# Altium PCB Temperature_Sensor_0_new.PcbDoc
Units mil, origin at the board's own origin, x right, y up, seen from the top; angles counter-clockwise.
Board outline 6000 x 4000 mil, 2 copper layers (Top Layer, Bottom Layer); 8 components, 5 nets, 25 pads, 3 vias.
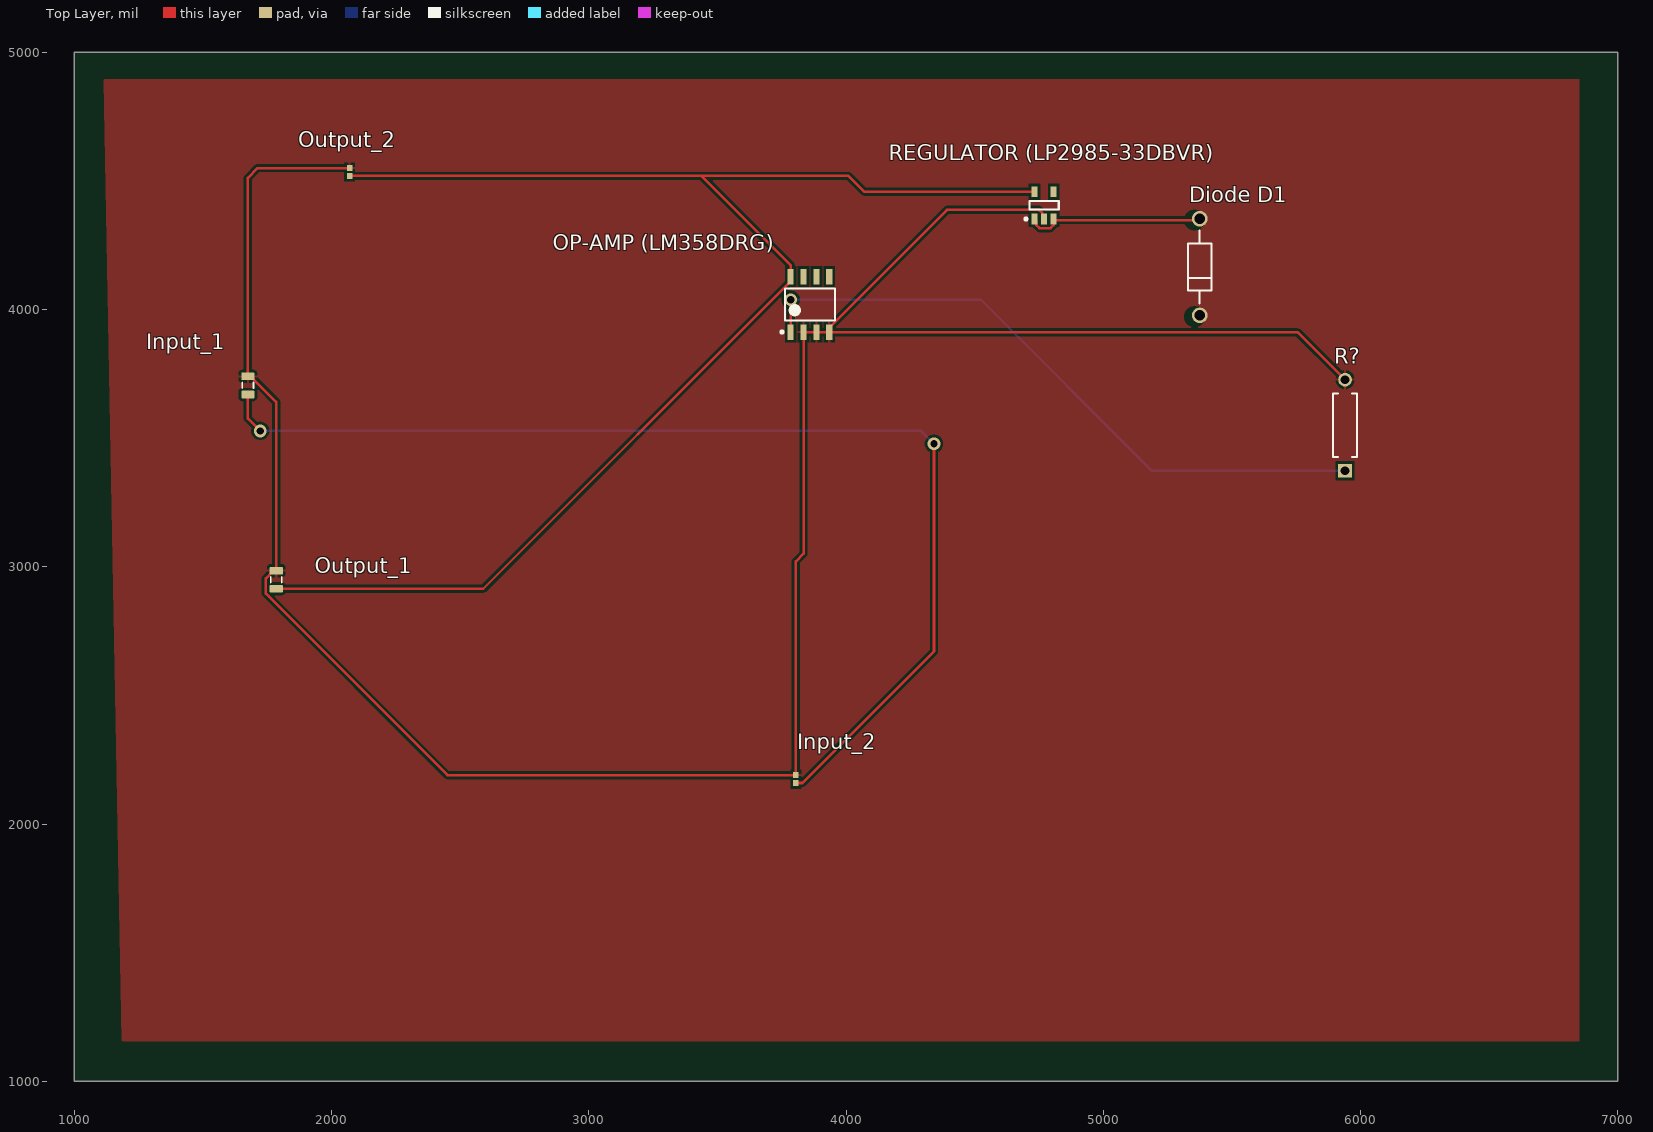
[diagram p0: Top Layer view]
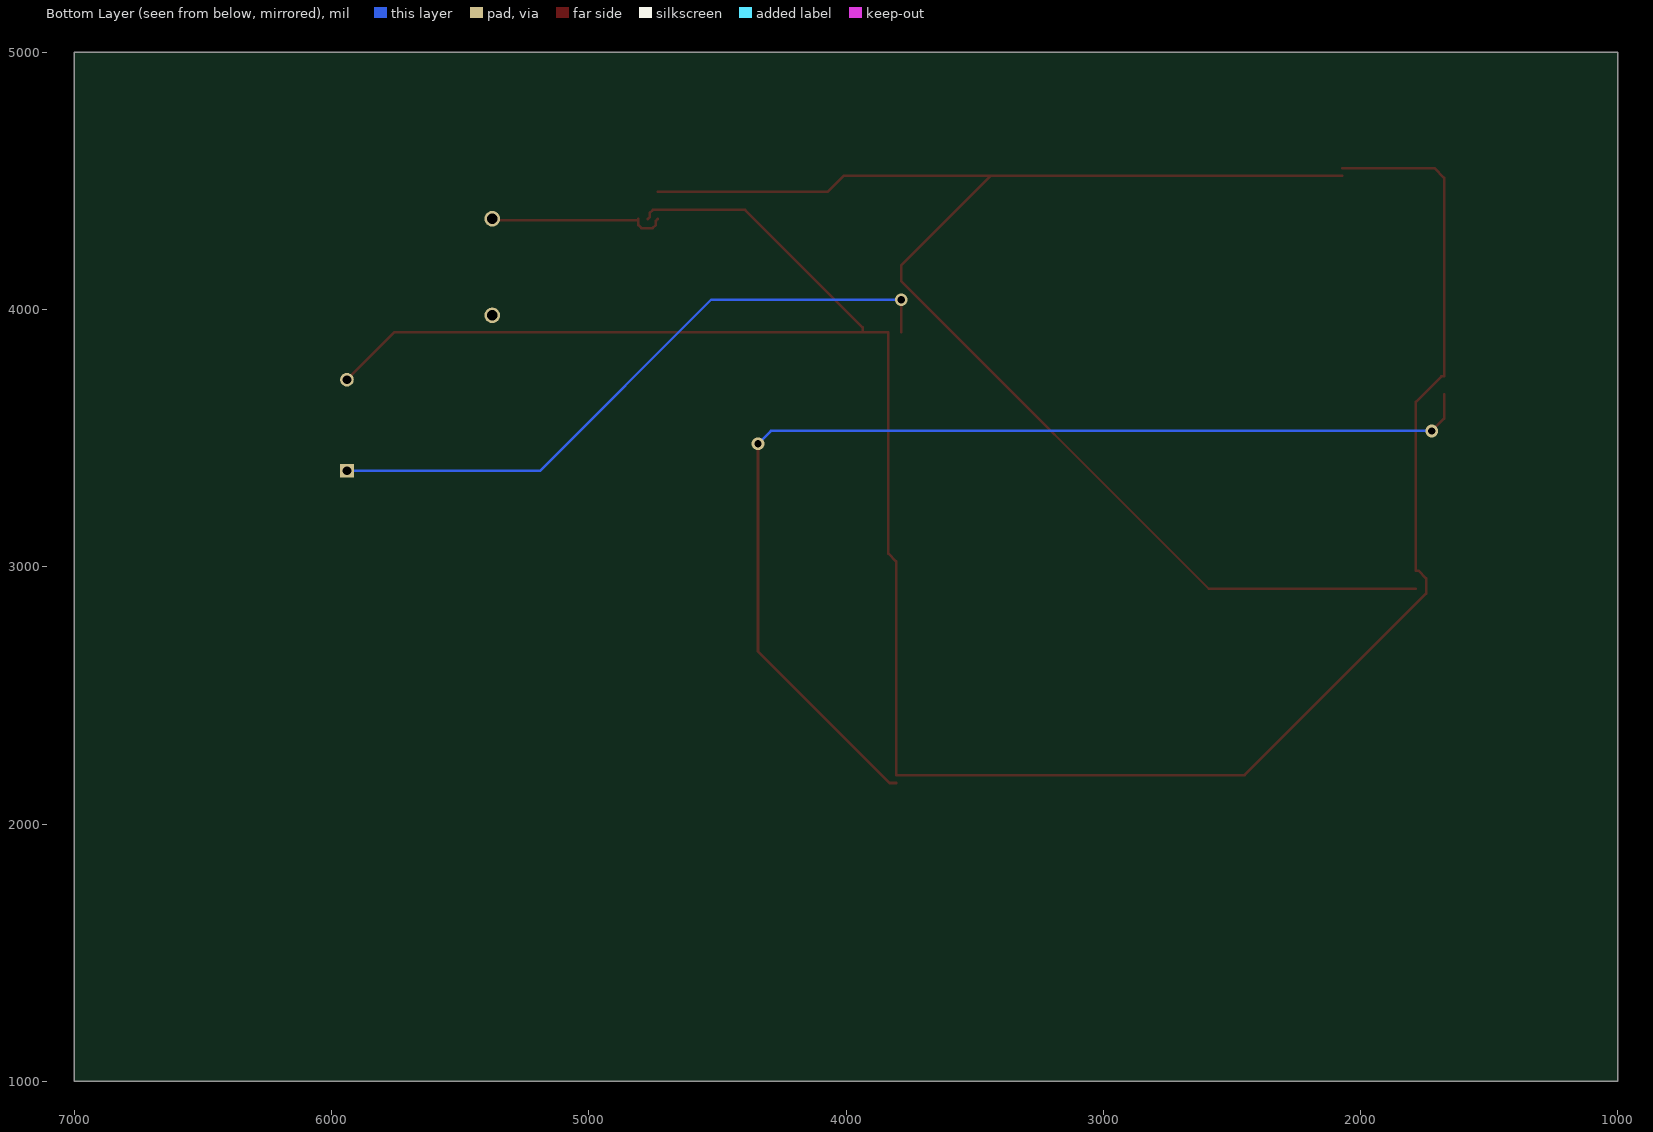
[diagram p1: Bottom Layer view, seen from below]
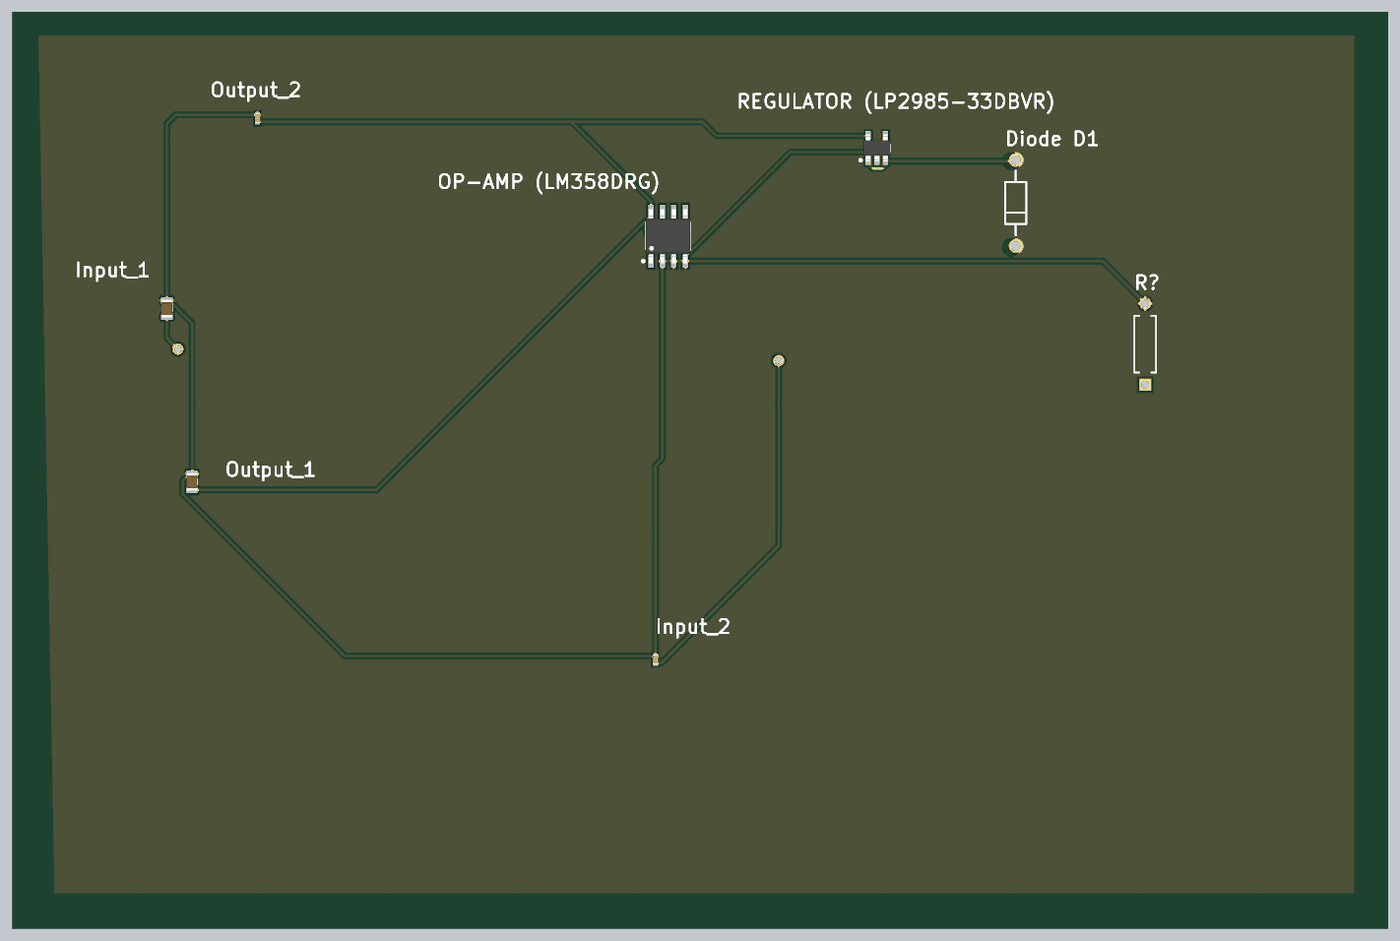
[diagram p2: 3D render of the assembled board from above, using the file's embedded part models]

## Layer stack, top to bottom
Top Solder: solder mask 0.4, Solder Resist, Dk 3.5
Top Layer: signal copper 1.4
Dielectric 1: dielectric 12.6, FR-4, Dk 4.8
Bottom Layer: signal copper 1.4
Bottom Solder: solder mask 0.4, Solder Resist, Dk 3.5

## Board outline
1000,1000 7000,1000 7000,5000 1000,5000

## Design rules (kind name [scope] priority, off if disabled: settings)
Clearance [All] p1: gap=10 ignorepadtopadclearanceinfootprint=FALSE
Clearance Input_2 [IsPad AND InComponent('Input_2') vs IsPad AND InComponent('Input_2')] p2: gap=7 ignorepadtopadclearanceinfootprint=FALSE
Clearance OUTPUT_2 [IsPad AND InComponent('Output_2') vs IsPad AND InComponent('Output_2')] p3: gap=7 ignorepadtopadclearanceinfootprint=FALSE
PolygonConnect [All] p1: connectstyle=Relief reliefconductorwidth=10 reliefentries=4 polygonreliefangle="90 Angle" airgapwidth=10
RoutingVias [All] p1: holewidth=28 width=50 viastyle="Through Hole" minholewidth=28 minwidth=50 maxholewidth=28 maxwidth=50
SolderMaskExpansion [All] p1: expansion=4 istentingtop=FALSE
SupplyNets "Schematic Supply Nets" [InNet('GND')] p1: voltage=0.000
Width [All] p1: maxlimit=20 minlimit=6 preferedwidth=10 bottomlayer_minwidth=10 bottomlayer_maxwidth=10 minimp=50.000000 maximp=50.000000 favimp=50.000000
30 further rules are at their usual default settings.

## Components (designator, comment, footprint, x,y, rotation, side; value= is the part's Value field where it differs from the comment)
"Diode D1" "1N5819" ONSC-AXIAL_LEAD-2-59-10_P 5375,4165 r90 top
Input_1 "Capacitor 100µF +/-20% 6.3V 0805" CAPC0805(2012)145_L 1675,3705 r90 top value=100µF
Input_2 "Capacitor 0.1 uF +/- 5% 16 V 0402" CAPC1005X56X25LL10T15 3805,2174.65 r90 top value=100nF
"OP-AMP (LM358DRG)" "" ONSC-SOIC-8-751-07_V 3860,4020 r90 top
Output_1 "Capacitor 47µF +/-40% 6.3V 0805" CAPC0805(2012)145_L 1785,2949.96 r90 top value=47µF
Output_2 "Capacitor 0.1 uF +/- 5% 16 V 0402" CAPC1005X56X25LL10T15 2070,4534.65 r90 top value=100nF
R? "MFR-25FBF52-1M" RESA60-630X240 5940,3550 r90 top value=1M
"REGULATOR (LP2985-33DBVR)" "" TI-DBV5_V 4770,4405 r90 top

## Footprints (in the part's own frame and the unit in brackets; to place one, negate y for a bottom-side part, rotate by r counter-clockwise, add the part's x,y. Pads: shape width x height; smd on the part's side, far side on the other; paste and mask are expansions set on the pad)
CAPC0805(2012)145_L [mm] "Chip Capacitor, Body 2.0x1.2mm, Height 1.45mm, IPC High Density"
  rrect25% 0.76x1.3 smd: 1(-0.9,0) 2(0.89,0)
  silkscreen extent -0.3,-0.55 0.3,0.55, body extent -1,-0.6 1,0.6, height 1.45
CAPC1005X56X25LL10T15 [mm] "Chip Capacitor, 2-Leads, Body 1.10x0.60mm, IPC High Density"
  rect 0.58x0.54 smd: 1(-0.39,0) 2(0.39,0)
  body extent -0.55,-0.3 0.55,0.3, height 0.56
ONSC-AXIAL_LEAD-2-59-10_P [mm] "AXIAL, 2-Leads, Diameter 2.35mm"
  round 1.55 hole 1.05: 1(-4.77,0) 2(4.77,0)
  silkscreen extent -3.6,-1.18 3.6,1.18, body extent -5.16,-1.17 5.16,1.17, height 2.34
ONSC-SOIC-8-751-07_V [mm] "SOIC, 8-Leads, Body 4.9x3.9mm, Pitch 1.27mm"
  rect 1.52x0.6 smd: 1(-2.74,1.905) 2(-2.74,0.635) 3(-2.74,-0.635) 4(-2.74,-1.905) 5(2.74,-1.905) 6(2.74,-0.635) 7(2.74,0.635) 8(2.74,1.905)
  silkscreen extent -2.86,-2.45 1.57,2.88, body extent -3,-2.5 3,2.5, height 1.75
RESA60-630X240 [mm] "Axial Resistor, 2-Leads, Dia 2.4mm, Body Length 6.3mm"
  rect 1.35x1.35 hole 0.85: 1(-4.5,0)
  round 1.35 hole 0.85: 2(4.5,0)
  silkscreen extent -3.15,-1.2 3.15,1.2, body extent -4.77,-1.19 4.77,1.2, height 2.4
TI-DBV5_V [mm] "SOT23, 5-Leads, Body 3.05x1.75mm, Pitch 0.95mm"
  rect 1.05x0.6 smd paste-0.025 mask+0: 1(-1.35,0.95) 2(-1.35,0) 3(-1.35,-0.95)
  rect 1.05x0.6 smd paste-0.025 mask+0.07: 4(1.35,-0.95) 5(1.35,0.95)
  silkscreen extent -1.47,-1.45 0.42,1.92, body extent -1.5,-1.53 1.5,1.53, height 1.45

## Part data
"Diode D1": library part CMP-004-00009-2, "Low Drop Power Schottky Rectifier, 40 V, 1 A, 2-Pin DO-41, RoHS", Case/Package=DO, Forward Current=1A, Manufacturer="ON Semiconductor", Max Operating Temperature=125°C, Max Surge Current=25A, Min Operating Temperature=-65°C, Package Description="2-Pin, Axial Lead, Diameter 2.35 mm", Package Reference=AXIAL_LEAD-2-59-10, Package Version="Rev. U, 02/2005", Peak Reverse Current=1mA, Datasheet URL=http://www.onsemi.cn/pub_link/Collateral/1N5817-D.PDF, Datasheet Version="Rev. 10, 07/2006", Manufacturer URL=http://www.onsemi.com/, Mounting Technology=TH, Package URL=http://www.onsemi.cn/pub_link/Collateral/59-10.PDF, Packaging=Bulk, Pins=2, RoHS Compliant=True
Input_1: library part CMP-001-00054-4, "Chip Capacitor, 100µF +/-20%, 6.3V, 0805, Thickness 1.45 mm", Case/Package=0805, Max Operating Temperature=85°C, Min Operating Temperature=-55°C, Tolerance=10%, Voltage Rating=6.3V, Mounting Technology=SMT, Pins=2
Input_2 Output_2: library part CMP-001-00001-6, "Chip Capacitor, 0.1 uF, +/- 5%, 16 V, 0402 (1005 Metric)", Capacitor Type=Ceramic, Case/Package=0402, Max Operating Temperature=125°C, Min Operating Temperature=-55°C, Tolerance=5%, Voltage Rating=16V, Mounting Technology=SM, Pins=2, RoHS Compliant=True
"OP-AMP (LM358DRG)": library part CMP-014-00017-2, "Single Supply Dual Operational Amplifier, 3 to 32 V, 0 to 70 degC, 8-Pin SOIC, Pb-Free, Tape and Reel", Case/Package=SOIC, Manufacturer="ON Semiconductor", Max Dual Supply Voltage=16V, Max Input Voltage=28.3V, Max Operating Temperature=70°C, Max Supply Voltage=44V, Min Dual Supply Voltage=1.5V, Min Input Voltage=0uV, Min Operating Temperature=0°C, Min Supply Voltage=2.3V, Nominal Dual Supply Voltage=12V, Nominal Supply Current=35uA, Nominal Voltage Gain=100dB, Output Current=40mA, Package Description="8-Pin Small Outline Integrated Circuit, Body 4.9 x 3.9 mm, Pitch 1.27 mm", Package Quantity=2500, Package Reference=SOIC-8-751-07, Channels=2, Common Mode Rejection Ratio=65dB, Datasheet URL=http://www.onsemi.cn/pub_link/Collateral/LM358-D.PDF, Datasheet Version="Rev. 32, 10/2016", Manufacturer URL=http://www.onsemi.com/, Mounting Technology=SM, Nominal Gain Bandwith Product=200KHz, Nominal Supply Voltage=12V, Packaging=TapeandReel, Pins=8, RoHS Compliant=True, Slew Rate=0.07V/us
Output_1: library part CMP-001-00082-4, "Chip Capacitor, 47µF +/-40%, 6.3V, 0805, Thickness 1.45 mm", Case/Package=0805, Max Operating Temperature=85°C, Min Operating Temperature=-55°C, Tolerance=10%, Voltage Rating=6.3V, Mounting Technology=SMT, Pins=2
R?: library part CMP-009-00049-4, "Axial Resistor, 1 MOhm, +/- 1%, 250 mW, -55 to 155 degC, 2-Pin THD, RoHS, Bulk", Case/Package=Axial, Manufacturer=Yageo, Max Operating Temperature=155°C, Min Operating Temperature=-55°C, Package Description="2-Pin Axial Lead, Dia 2.4 mm, Body Length 6.3 mm", Package Quantity=200, Package Reference=MFR-25, Power=250mW, Tolerance=1%, Voltage Rating=250V, Datasheet URL=http://www.yageo.com/documents/recent/Yageo%20LR_MFR_2013.pdf, Datasheet Version=Apr-13, Manufacturer URL=http://www.yageo.com/, Mounting Technology=TH, Packaging=Bulk, RoHS Compliant=True
"REGULATOR (LP2985-33DBVR)": library part CMP-019-00026-3, "Single Output Low Noise LDO, 150 mA, Fixed 3.3 V Output, 1.5% Tolerance, 2.2 to 16 V Input, Low IQ, 5-Pin SOT-23 (DBV), -40 to 125 degC, Green (RoHS & no Sb/Br), Tape and Reel", Case/Package=SOT-23-5, Dropout Voltage=3mV, Manufacturer="Texas Instruments", Max Input Voltage=16V, Max Operating Temperature=125°C, Max Ouput Current=150mA, Min Input Voltage=2.2V, Min Operating Temperature=-40°C, Nominal Output Voltage=3.3V, Package Description="5-Pin Small Outline Transistor, Body 2.9 x 1.6 mm, Pitch 0.95 mm", Package Quantity=3000, Package Reference=DBV5, Package Version="4073253-4/N, 12/2014", Datasheet URL=http://www.ti.com/lit/ds/symlink/lp2985.pdf, Datasheet Version="SLVS522O, 01/2015", Manufacturer URL=http://www.ti.com/, Mounting Technology=SM, Output Current=150mA, Output Voltage=3.3V, Outputs=1, Package URL=http://www.ti.com/lit/ml/mpds018l/mpds018l.pdf, Packaging=TapeandReel, Pins=16, RoHS Compliant=True

## Via types
v1: diameter 50, hole 28, Top Layer to Bottom Layer, 3 vias

## Nets (pads, with @x,y where several pads share a name; then routed paths per layer and width w, separated by ;. In a path a pad name is that pad's centre, name@x,y a point inside that pad or via, vN(x,y) a via of type N, cw(c..) or ccw(c..) an arc to the next point about the centre after c; other vN are vias at no path point)
GND: "OP-AMP (LM358DRG).2" "OP-AMP (LM358DRG).3" "OP-AMP (LM358DRG).4" "REGULATOR (LP2985-33DBVR).2" Input_1.2 Input_2.2 Output_1.2 Output_2.2 R?.2 | length 9437.9
  Top Layer w10: Output_2.2 1713,4550 1675,4512 Input_1.2 1685.63,3740.04 1785,3640.67 Output_1.2 1774.37,2985 1744.41,2955.04 1744.41,2895.55 2449.96,2190 Input_2.2 3805,3021 3835,3051 3835,3912.13 3885,3912.13 3935,3912.13 ; 4770,4351.85 4763.19,4358.66 4763.19,4374.95 4750.62,4387.52 4392.28,4387.52 3935,3930.24 3935,3912.13 ; R?.2 5755.04,3912.13 3935,3912.13
OP_OUT: "OP-AMP (LM358DRG).1" R?.1 | length 2556.4
  Top Layer w10: 3785,3912.13 v1(3785,4038)
  Bottom Layer w10: v1(3785,4038) 4524.54,4038 5189.71,3372.83 R?.1
VIN: Input_1.1 Input_2.1 | length 4357.3
  Top Layer w10: Input_1.1 1675,3576 v1(1723,3528) ; Input_2.1 3830.63,2159.29 4342,2670.66 v1(4342,3478)
  Bottom Layer w10: v1(1723,3528) 4292,3528 v1(4342,3478)
VIN_REG: "Diode D1.2" "REGULATOR (LP2985-33DBVR).1" "REGULATOR (LP2985-33DBVR).3" | length 677.1
  Top Layer w10: 4732.6,4351.85 4739.41,4345.04 4739.41,4328.75 4751.98,4316.18 4795.58,4316.18 4807.4,4328 4807.4,4351.85 4811.46,4347.8 5355,4347.8
VOUT_3V3: "OP-AMP (LM358DRG).8" "REGULATOR (LP2985-33DBVR).5" Output_1.1 Output_2.1 | length 5736.1
  Top Layer w10: Output_1.1 2589.76,2914.53 3785,4109.76 3785,4127.87 3785,4172.8 3438.5,4519.29 ; Output_2.1 3438.5,4519.29 ; 4732.6,4458.15 4070.35,4458.15 4009.21,4519.29 3438.5,4519.29
pads on no net: "Diode D1.1" "OP-AMP (LM358DRG).5" "OP-AMP (LM358DRG).6" "OP-AMP (LM358DRG).7" "REGULATOR (LP2985-33DBVR).4"

## Polygon pours and split planes (outlines as drawn)
GND on Top Layer "GND_L01_P000" (solid, pour order 0): 1185,1150 1190,1155 6850,1155 6850,4895 1115,4895